# Altium PCB PCB_VL53L0X.PcbDoc
Units mm, origin at the board's own origin, x right, y up, seen from the top; angles counter-clockwise.
Board outline 26.04 x 25.4 mm, 2 copper layers (Top Layer, Bottom Layer); 11 components, 9 nets, 46 pads, 9 vias.
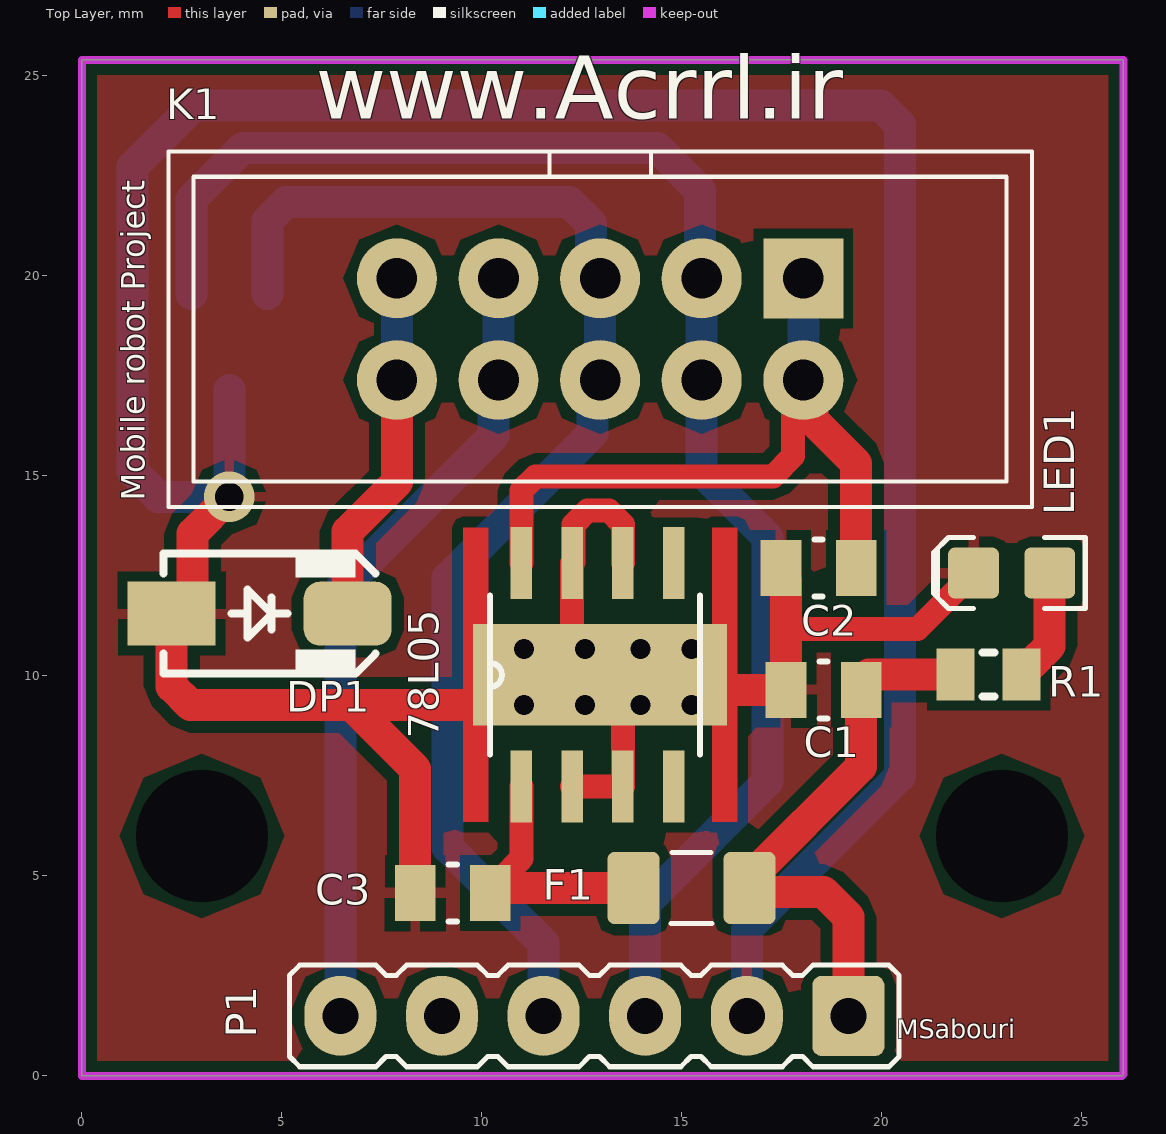
[diagram p0: Top Layer view]
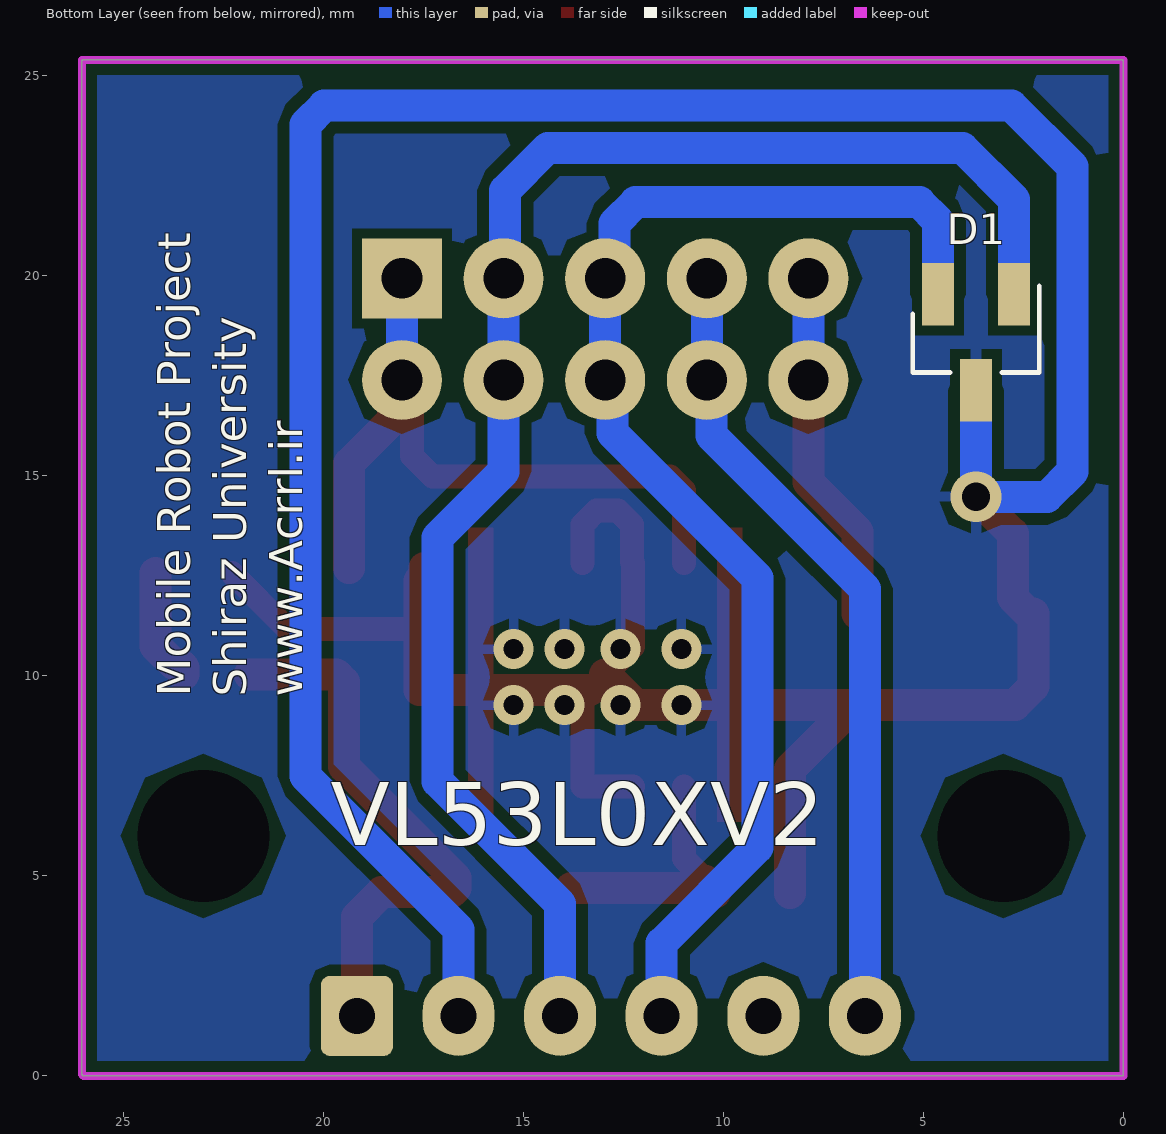
[diagram p1: Bottom Layer view, seen from below]

## Layer stack, top to bottom
Top Solder: solder mask 0.0102, Solder Resist, Dk 3.5
Top Layer: signal copper 0.0356
Dielectric 1: dielectric 0.32, FR-4, Dk 4.8
Bottom Layer: signal copper 0.0356
Bottom Solder: solder mask 0.0102, Solder Resist, Dk 3.5

## Board outline
0,0 26,0 26.035,0.035 26.035,25.4 0,25.4

## Design rules (kind name [scope] priority, off if disabled: settings)
Clearance [All] p1: gap=0.254 ignorepadtopadclearanceinfootprint=FALSE except(0: Arc-Hole Track-Hole SMDPad-Hole THPad-Hole Via-Hole Fill-Hole Poly-Hole Region-Hole Text-Hole)
PolygonConnect [All] p1: connectstyle=Relief reliefconductorwidth=0.254 reliefentries=4 polygonreliefangle="90 Angle" airgapwidth=0.254
RoutingVias [All] p1: holewidth=0.711 width=1.27 viastyle="Through Hole" minholewidth=0.711 minwidth=1.27 maxholewidth=0.711 maxwidth=1.27
SolderMaskExpansion [All] p1: expansion=0.102 istentingtop=FALSE
Width [All] p1: maxlimit=0.8 minlimit=0.254 preferedwidth=0.5
30 further rules are at their usual default settings.

## Components (designator, comment, footprint, x,y, rotation, side; value= is the part's Value field where it differs from the comment)
78L05 "" 78L05CD15V5V_LIB 10.541,10.033 r90 top (schematic designator U1)
C1 "100nF" 0805 18.542,9.652 r0 top value=470nF
C2 "0.33uF" 0805 18.415,12.7 r0 top value=470nF
C3 "0.33uF" 0805 9.271,4.572 r0 top value=470nF
D1 "SM712" psm712 4.633,19.545 r270 bottom
DP1 "1N5819" 430X270D 4.445,11.557 r0 top
F1 "Slow-blow" RESC3216X70N 15.24,4.699 r0 top value=100mA
K1 "IDC10" IDC10-B 18.034,19.939 r180 top
LED1 "Green" LED-0805-K 23.241,12.573 r180 top
P1 "Header 6pin" HDR1X6 19.161,1.5 r180 top locked
R1 "330" "RES 0805 (2012X06L)" 23.494,10.033 r180 top

## Footprints (in the part's own frame and the unit in brackets; to place one, negate y for a bottom-side part, rotate by r counter-clockwise, add the part's x,y. Pads: shape width x height; smd on the part's side, far side on the other; paste and mask are expansions set on the pad)
78L05CD15V5V_LIB [mil]
  rect 70.87x21 smd: 1(-110.35,-17.44) 2(-110.35,-67.44) 3(-110.35,-117.44) 4(-110.35,-167.44) 5(109.65,-167.44) 6(109.65,-117.44) 7(109.65,-67.44) 8(109.65,-17.44)
  rect 100x250 smd paste+0 mask+0: 7(0,-95)
  Top Layer region: -145,15 145,15 145,40 -145,40
  Top Layer region: -145,-230 145,-230 145,-205 -145,-205
  Top Layer region: 85,105
  silkscreen extent -78,-193 78,14
430X270D [mm] "SMA Molded Diode, 2-Leads, Body 4.3x2.7mm"
  rect 2.2x1.6 smd: 1(-2.2,0)
  rrect50% 2.2x1.6 smd: 2(2.2,0)
  silkscreen extent -2.4,-1.5 2.9,1.5, body extent -2.75,-1.4 2.75,1.4, height 2.6
0805 [mil]
  rect 40x55 smd: 1(-37,0) 2(37,0)
  silkscreen extent -4,-28 4,28, body extent -47,-28 47,28, height 24
HDR1X6 [mm] "Connector; Header; 6 Position"
  rrect25% 1.8x2 hole 0.9: 1(0,0)
  oval 1.8x2 hole 0.9: 2(2.54,0) 3(5.08,0) 4(7.62,0) 5(10.16,0) 6(12.7,0)
  silkscreen extent -1.27,-1.27 13.97,1.27
IDC10-B [mm]
  rect 2x2 hole 1.016: 1(0,0)
  round 2 hole 1.016: 2(0,2.54) 3(2.54,0) 4(2.54,2.54) 5(5.08,0) 6(5.08,2.54) 7(7.62,0) 8(7.62,2.54) 9(10.16,0) 10(10.16,2.54)
  silkscreen extent -5.72,-3.18 15.87,5.72, body extent -5.72,-3.18 15.88,5.72, height 9.1
LED-0805-K [mil]
  round 20 on Mech15: 0(0,0)
  rrect25% 50x50 smd: A(-37.5,0) K(37.5,0)
  Top Layer pour cut-out: -15,30 15,30 15,-30 -15,-30
  silkscreen extent -72,-35 77,35, body extent -39,-25 39,25, height 31
psm712 [mil]
  rect 61.42x31.5 smd: 1(0,74.8) 2(0,0) 3(94.48,37.4)
  silkscreen extent -8,-25 77,100
"RES 0805 (2012X06L)" [mm] "Chip Resistor, 2-Leads, Body 2.0x1.3mm, IPC High Density _ (0.100 W)"
  rect 0.95x1.3 smd: 1(0,0) 2(1.65,0)
  silkscreen extent 0.67,-0.55 0.97,0.55, body extent -0.19,-0.63 1.84,0.64, height 0.6
RESC3216X70N [mm] "Chip Resistor, Body 3.2x1.6mm, EIA 1206, IPC Medium Density"
  round 0.508 on Mech15: 0(0,0)
  rrect25% 1.3x1.8 smd: 1(-1.45,0) 2(1.45,0)
  silkscreen extent -0.51,-0.89 0.51,0.89, body extent -1.62,-0.82 1.63,0.83, height 0.69

## Part data
78L05: library part "MC78L05ACDG 5V Regulator"
C1 C2 C3: library part "CAP 470nF 50V", "CAP CER 0.1UF 50V X7R 0805", Package=0805, Rating=50V, Tolerance=10%
D1: library part SM712.TC, "Asymmetrical TVS Diode for  Extended Common-Mode RS-485", Manufacturer=SEMTECH, Operating Temp="-55 to 125 °C", Storage Temp="-55 to 150 °C", Manufacture Part #=SM712.TC
DP1: "Schottkey Rectifiers", Data=16-12-2016, Designer="Abbas Basereh"
F1: library part FUSE_160mA_1206, "Fuse 160mA 63VDC 1206 SMD", Manufacturer 1="Holly Fuse", Manufacturer Part Number 1=12T-0160L, Package / Case="1206 (3216 metric)", Ratings="160mA; 63VDC; slow-blow", SCDType=spec
K1: "BOXHEADER 10 PIN", Color=Gray, Manufacturer="Assmann Electronics Inc", Manufacturer Part Number=AWHW10G-0202-T-R, Supplier Part Number=HRP10H-ND, Category="Connectors, Interconnects", Connector Type="Header, Shrouded", Contact Finish=Gold, Contact Finish Thickness=Flash, Contact Mating Length=-, Contact Type="Male Pin", Fastening Type=-, Features=-, Mounting Type="Through Hole", Number of Positions=10, Number of Positions Loaded=All, Number of Rows=2, Packaging=Tray, Pitch="0.100\" (2.54mm)", RoHS="RoHS Compliant", Row Spacing="0.100\" (2.54mm)", Supplier=Digi-Key, Supplier 1=Digi-Key, Supplier Part Number 1=HRP10H-ND, Termination=Solder
LED1: library part LED_SMD_Green_0805_6mcd, "LED, 0805 SMD, Green", Manufacturer 1=LITE-ON, Manufacturer Part Number 1=LTST-C171GKT, Package / Case=0805, Ratings="6 mcd; 569 nm", Supplier Part Number 1=160-1423-1-ND, Color=Green, Material=GaP, SCDType=source, Supplier 1=Digi-Key
P1: library part Header6P, "Header, 6-pin"
R1: library part Resistor, "Resistor", Power="1/8 W", Tolerance=5%

## Free pads (board coordinates)
  round 0 hole 3.3: 2(23,6) 4(3,6)

## Via types
v1: diameter 1, hole 0.5, Top Layer to Bottom Layer, 8 vias
v2: diameter 1.27, hole 0.711, Top Layer to Bottom Layer, 1 vias

## Nets (pads, with @x,y where several pads share a name; then routed paths per layer and width w, separated by ;. In a path a pad name is that pad's centre, name@x,y a point inside that pad or via, vN(x,y) a via of type N, cw(c..) or ccw(c..) an arc to the next point about the centre after c; other vN are vias at no path point)
GND: 78L05.2 78L05.3 78L05.6 78L05.7 C1.1 C2.1 C3.1 D1.3 DP1.1 LED1.K P1.2 | length 102.3
  Top Layer w0.6: 78L05.2 78L05.3 13.524,9.463 13.335,9.652 12.954,10.033 12.254,10.733 12.254,12.818 12.287,12.851 12.287,13.781 12.639,14.132 13.172,14.132 13.524,13.781 78L05.6 ; 17.602,11.176 20.892,11.176 LED1.K
  Top Layer w0.8: v2(3.683,14.478) 2.762,13.557 2.762,11.957 2.362,11.557 DP1.1 2.245,9.74 2.714,9.271 6.731,9.271 ; C3.1 8.331,7.671 6.731,9.271 ; 78L05.7@12.954,10.033 12.192,9.271 6.731,9.271 ; 78L05.7@13.335,9.652 C1.1 17.602,11.176 17.602,12.383 17.475,12.509 C2.1
  Bottom Layer w0.8: D1.3 v2(3.683,14.478) 1.905,14.478 1.27,15.113 1.27,22.733 2.794,24.257 19.978,24.257 20.447,23.788 20.447,7.493 16.621,3.667 P1.2
  other v1: 11.049,9.271 12.573,9.271 13.97,9.271 15.24,9.271 11.049,10.668 12.573,10.668 13.97,10.668 15.24,10.668
NetC3_2: 78L05.1 C3.2 F1.1 | length 6.7
  Top Layer w0.6: C3.2 10.211,4.591 10.211,4.763 10.419,4.971 10.524,4.971 10.984,5.43 78L05.1
  Top Layer w0.8: C3.2@10.211,4.591 10.319,4.699 F1.1
NetDP1_2: DP1.2 K1.9 K1.10 | length 8.9
  Top Layer w0.8: DP1.2 6.645,13.614 7.874,14.843 K1.10
  Bottom Layer w0.8: K1.10 K1.9
NetLED1_A: LED1.A R1.1 | length 2.9
  Top Layer w0.8: R1.1 23.494,10.208 23.569,10.283 23.725,10.283 24.194,10.752 LED1.A
SCL: D1.1 K1.3 K1.4 P1.3 | length 38.7
  Bottom Layer w0.8: D1.1 2.733,21.91 4.026,23.203 14.389,23.203 15.453,22.139 15.453,19.98 K1.3 15.494,15.113 17.145,13.462 17.145,7.366 14.081,4.302 P1.3
SDA: D1.2 K1.5 K1.6 P1.4 | length 32.8
  Bottom Layer w0.8: D1.2 4.633,21.375 5.102,21.844 12.192,21.844 12.724,21.312 12.724,20.169 K1.5 K1.6 12.77,17.215 12.77,16.072 9.144,12.446 9.144,5.715 11.541,3.318 P1.4
V5: C1.2 F1.2 P1.1 R1.2 | length 14
  Top Layer w0.8: P1.1 19.161,3.976 18.54,4.597 16.792,4.597 F1.2 16.69,4.949 19.482,7.741 C1.2 19.482,9.842 19.672,10.033 R1.2
VCC: 78L05.8 C2.2 K1.1 K1.2 | length 18.8
  Top Layer w0.6: 78L05.8 10.984,14.635 11.335,14.986 17.272,14.986 17.78,15.494 17.78,17.145 K1.2
  Top Layer w0.8: K1.2 18.264,17.169 18.264,16.407 19.355,15.316 C2.2
  Bottom Layer w0.8: K1.2 K1.1
Xshut: K1.7 K1.8 P1.6 | length 20.1
  Bottom Layer w0.8: P1.6 6.461,12.176 10.293,16.008 10.293,17.278 K1.8 K1.7
pads on no net: 78L05.4 78L05.5 F1.0 LED1.0 P1.5

## Polygon pours and split planes (outlines as drawn)
GND on Top Layer "GND_L02_P-001" (solid, pour order 0): 0,0 26,0 26,25.365 26.035,25.4 0,25.4
GND on Bottom Layer "GND_L02_P-001" (solid, pour order 4): 0.018,0.018 26.017,0.018 26.035,0.035 26.035,25.4 0,25.4
GND on Bottom Layer "GND_L02_P-001" (solid, pour order 3): -3.937,11.938
GND on Bottom Layer "GND_L02_P-001" (solid, pour order 2): 0,0 0.018,0.018 26.017,0.018 26.017,25.382 26.035,25.4 0,25.4

## Keep-outs
Keep-Out Layer:
  the board outline again, w0.2

## Silkscreen, mask and mechanical layers (free items; w line width, h text height)
Top Overlay:
  text "www.Acrrl.ir" at 5.842,23.408 h2.7
  text "Mobile robot Project" at 1.768,14.379 h1 r90
  text "MSabouri" at 20.375,0.783 h0.8
Bottom Overlay:
  text "Mobile Robot Project / Shiraz University / www.Acrrl.ir" at 20.257,9.475 h1.4 r270
  text "VL53L0XV2" at 19.812,5.247 h2.7

## Text inside footprints (layer, text, board x,y; h text height)
D1: Mechanical 15 "Q3" at 2.284,19.228 h0.5